# Altium PCB Plate.PcbDoc
Units mm, origin at the board's own origin, x right, y up, seen from the top; angles counter-clockwise.
Board outline 120.65 x 77.47 mm, 2 copper layers (Top Layer, Bottom Layer), stack 1.071 mm thick; 56 components, 72 nets, 283 pads, 18 vias.
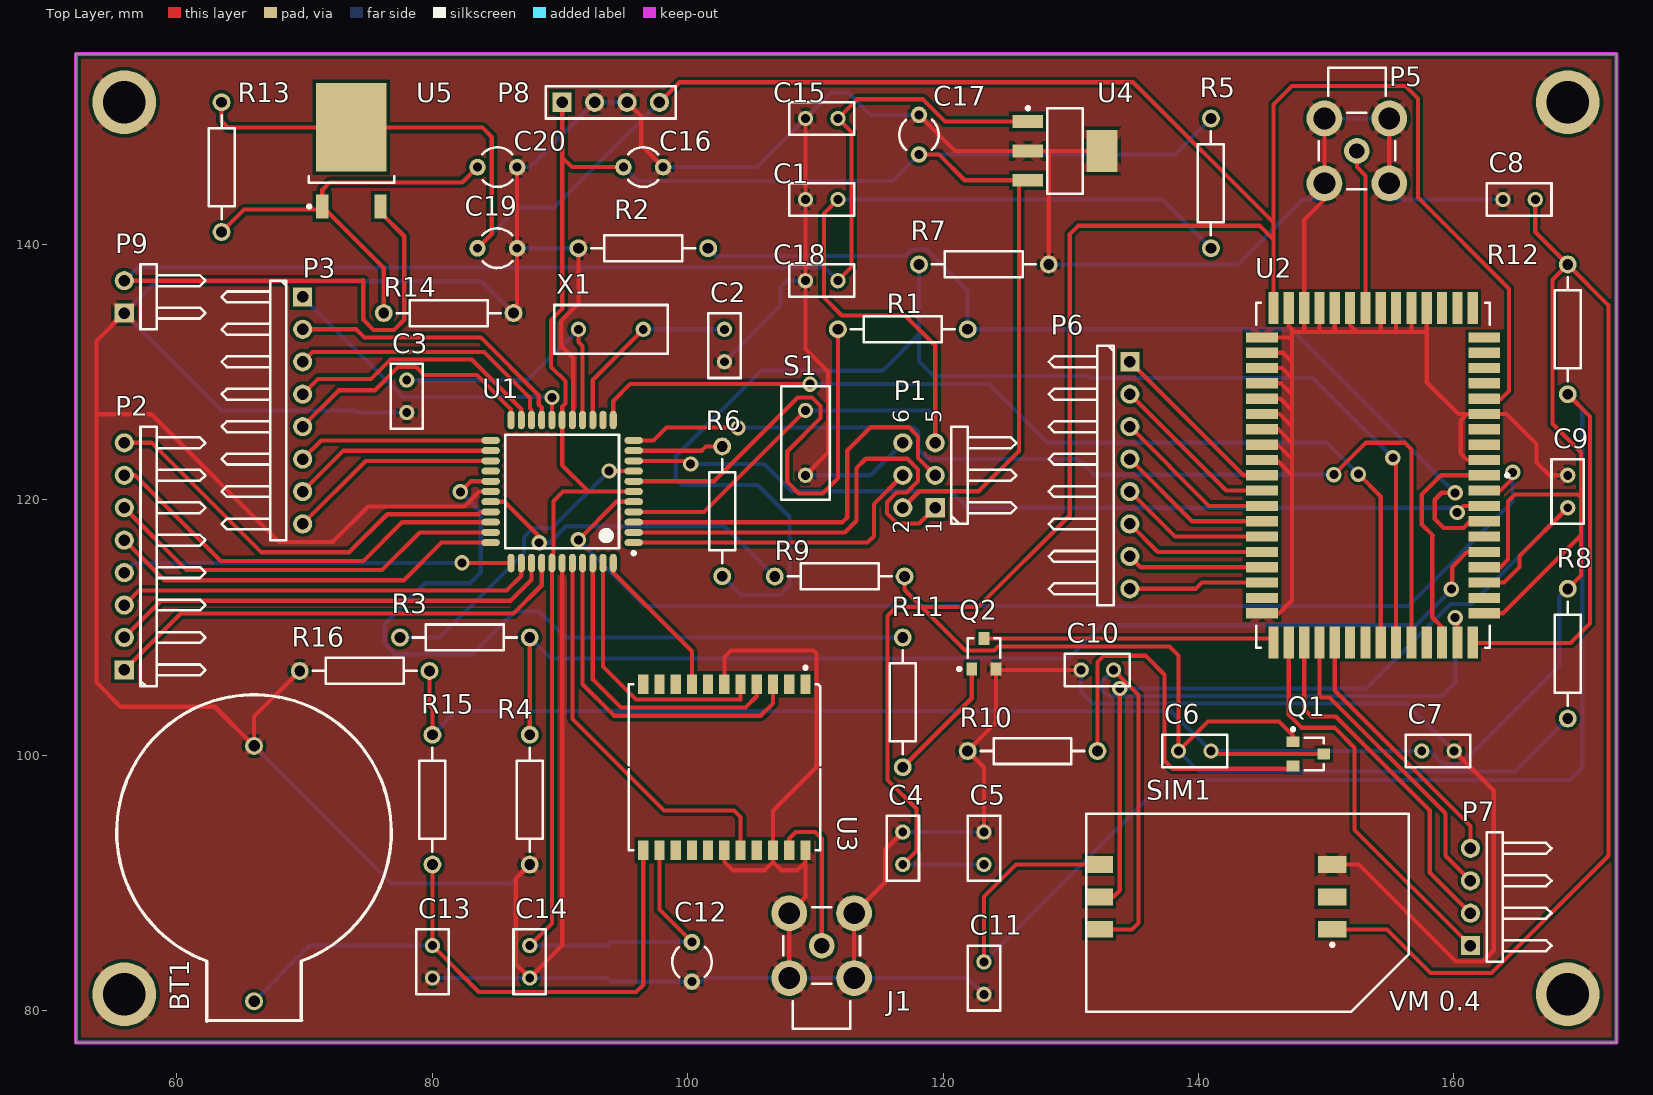
[diagram p0: Top Layer view]
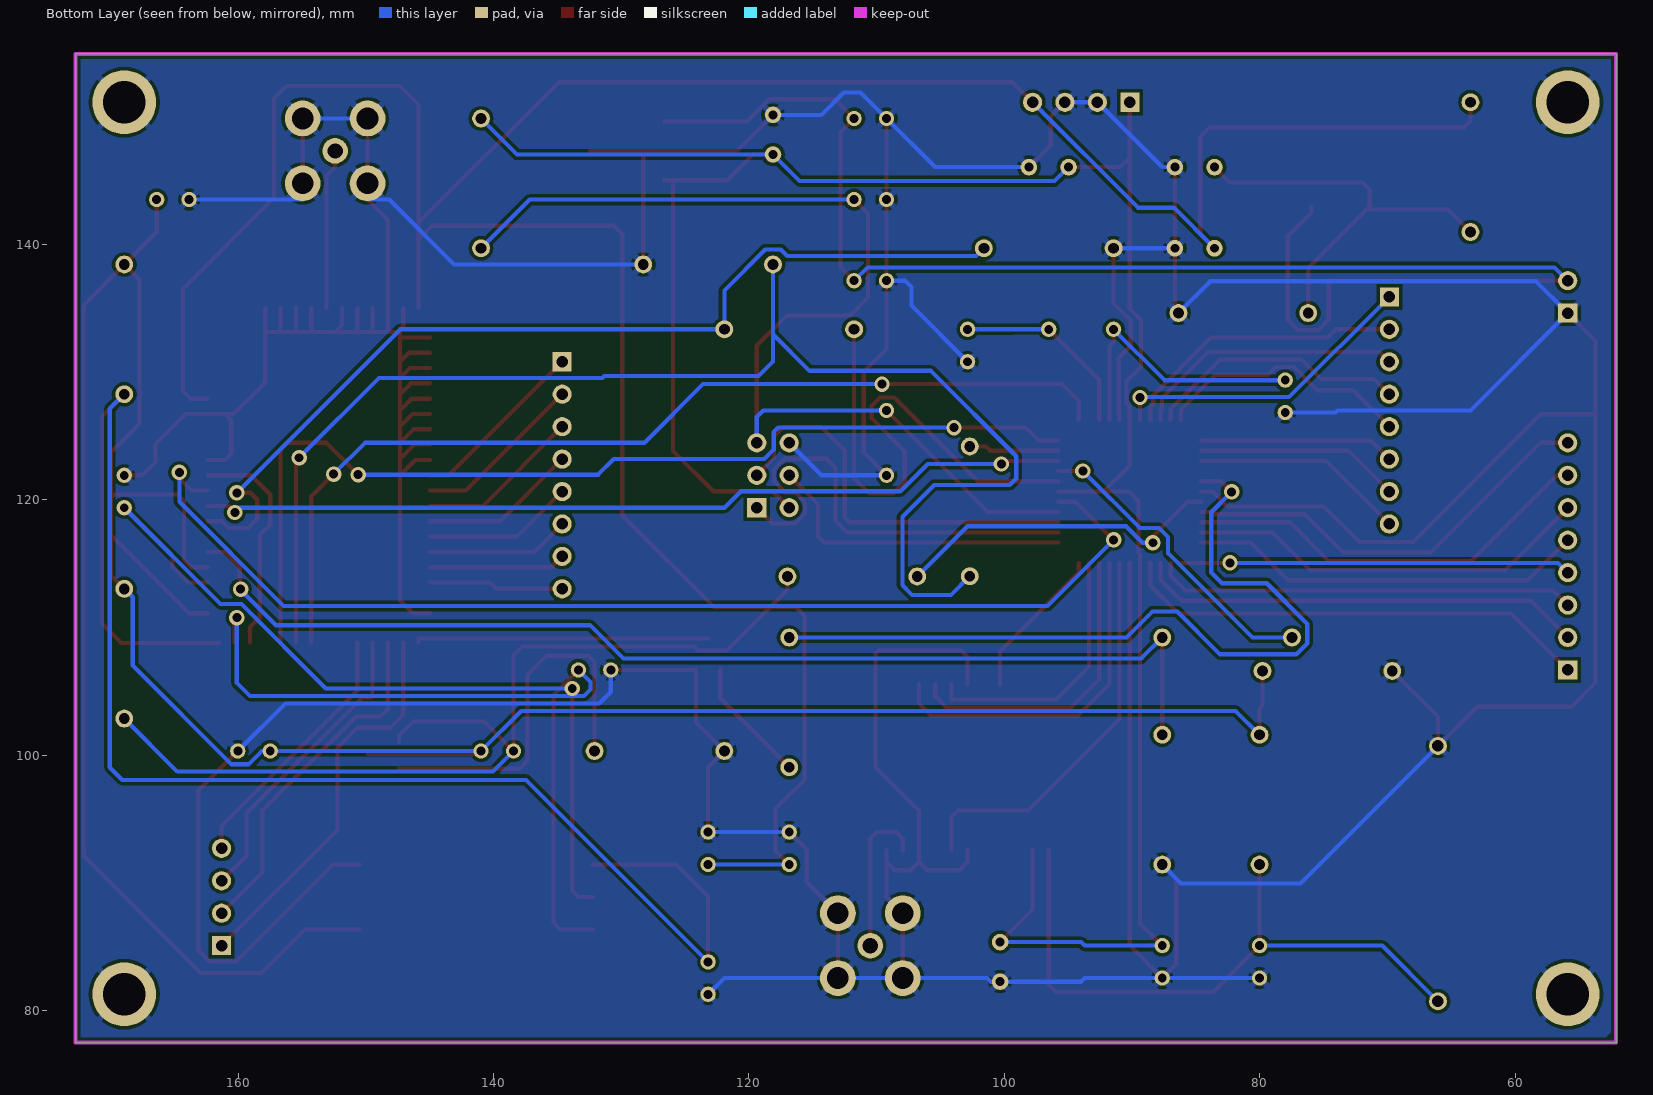
[diagram p1: Bottom Layer view, seen from below]

## Layer stack, top to bottom
Top Layer: signal copper 0.0356
Dielectric: core 1, FR-4, Dk 4.8
Bottom Layer: signal copper 0.0356

## Board outline
52.07,154.94 170.18,154.94 171.45,154.94 172.72,154.94 172.72,77.47 52.07,77.47

## Design rules (kind name [scope] priority, off if disabled: settings)
Clearance Clearance_3 [InNetClass('U1_Nets')] p1: gap=0.254
Clearance [InNetClass('U2_Nets') Or InNetClass('U3_Nets')  Or  InNetClass('U4_Nets') Or  InNetClass('U5_Nets')  Or  InNetClass('Q1_Nets') Or  InNetClass('Q2_Nets') vs Not InNetClass('U1_Nets')] p2 off: gap=0.4
Clearance Clearance_1 [Not InNetClass('U1_Nets') And Not InNetClass('U2_Nets') And Not InNetClass('U3_Nets') And Not InNetClass('U4_Nets') And Not  InNetClass('U5_Nets') And Not InNetClass('Q1_Nets') And Not  InNetClass('Q2_Nets') vs InNet('GND')] p3: gap=0.5
Clearance Clearance_2 [All] p4 off: gap=0.5
HoleSize [All] p1: absolutevalues=TRUE maxlimit=2.54 minlimit=0.3 maxpercent=80.000 minpercent=20.000
HoleToHoleClearance [All] p1: gap=2.54 allowstackedmicrovias=TRUE
PlaneClearance [All] p1: clearance=1.27
PlaneConnect [All] p1: planeconnectstyle=Relief reliefexpansion=0.5 reliefentries=4 reliefconductorwidth=1 reliefairgap=0.35
PolygonConnect [All] p1: connectstyle=Relief reliefconductorwidth=0.5 reliefentries=4 polygonreliefangle="45 Angle"
RoutingTopology [All] p1 off: topology=Daisy_MidDriven
RoutingVias [All] p1: holewidth=0.7 width=1.2 viastyle="Through Hole" minholewidth=0.7 minwidth=1.2 maxholewidth=0.7 maxwidth=1.2
SMDNeckDown [All] p1: percent=85.000
SilkscreenOverComponentPads [All] p1: minsilkscreentomaskgap=0.254
SolderMaskExpansion [All] p1: expansion=0.2
Width Width_2 [All] p1: maxlimit=0.4 minlimit=0.254 preferedwidth=0.33
Width [InNetClass('U1_Nets')] p2 off: maxlimit=0.45 minlimit=0.45 preferedwidth=0.45 checkconnectedcopper=TRUE
Width Width_1 [Not InNetClass('U1_Nets')] p3 off: maxlimit=1 minlimit=0.5 preferedwidth=0.6 checkconnectedcopper=TRUE
22 further rules are at their usual default settings.

## Classes and differential pairs
net class X1_Nets: NetC2_2 NetC3_2
net class U5_Nets: "+5 - 15V" NetC4_1 NetC20_1
net class U4_Nets: "+5 - 15V" GND NetC12_1
net class U3_Nets: GND NetBT1_1 NetC12_1 NetJ1_1 NetU1_40 NetU1_41 NetU1_42 NetU1_43 NetU1_44 NetU3_1 NetU3_2 NetU3_7 NetU3_9 NetU3_10 NetU3_11 NetU3_14 NetU3_15 NetU3_16 NetU3_19
net class U2_Nets: _CTS_ATM _DCD_ATM _DSR_ATM _RX_ATM GND NetC4_1 NetC6_2 NetC8_2 NetC9_2 NetC10_2 NetC11_2 NetP5_1 NetP6_1 NetP6_2 NetP6_3 NetP6_4 NetP6_5 NetP6_6 NetP6_7 NetP6_8 NetP7_1 NetP7_2 NetP7_3 NetP7_4 NetQ2_3 NetR1_1 NetR3_1 NetR6_1 NetU2_1 NetU2_2 NetU2_3 NetU2_4 NetU2_7 NetU2_8 NetU2_10 NetU2_14 NetU2_18 NetU2_23 NetU2_27 NetU2_28 NetU2_35 NetU2_64 NetU2_65 NetU2_66
net class U1_Nets: /RST _CTS_ATM _DCD_ATM _DSR_ATM _DTR_ATM _RING0_ATM _RTS_ATM _RX_ATM _TX_ATM GND MISO MOSI NetC2_2 NetC3_2 NetC12_1 NetP2_1 NetP2_2 NetP2_3 NetP2_4 NetP2_5 NetP2_6 NetP2_7 NetP2_8 NetP3_1 NetP3_2 NetP3_3 NetP3_4 NetP3_5 NetP3_6 NetP3_7 NetP3_8 NetR9_1 NetR11_1 NetU1_26 NetU1_40 NetU1_41 NetU1_42 NetU1_43 NetU1_44 SCK
net class SIM1_Nets: GND NetC8_2 NetC9_2 NetC10_2 NetC11_2 NetSIM1_5
net class R16_Nets: GND NetC6_2
net class R15_Nets: NetBT1_1 NetC6_2
net class R14_Nets: GND NetC20_1
net class R13_Nets: NetC4_1 NetC20_1
net class R12_Nets: NetC8_2 NetC11_2
net class R11_Nets: NetQ2_1 NetR11_1
net class R10_Nets: GND NetQ1_2
net class R9_Nets: NetC6_1 NetR9_1
net class R8_Nets: NetC6_1 NetC6_2
net class R7_Nets: GND NetR6_1
net class R6_Nets: _DTR_ATM NetR6_1
net class R5_Nets: /RST NetC12_1
net class R4_Nets: GND NetR3_1
net class R3_Nets: _RTS_ATM NetR3_1
net class R2_Nets: GND NetR1_1
net class R1_Nets: _TX_ATM NetR1_1
net class Q2_Nets: GND NetQ2_1 NetQ2_3
net class Q1_Nets: NetC6_1 NetC6_2 NetQ1_2
net class P9_Nets: "+5 - 15V" GND
net class P8_Nets: GND NetC4_1 NetC12_1
net class P7_Nets: NetP7_1 NetP7_2 NetP7_3 NetP7_4
net class P6_Nets: NetP6_1 NetP6_2 NetP6_3 NetP6_4 NetP6_5 NetP6_6 NetP6_7 NetP6_8
net class P5_Nets: GND NetP5_1
net class P3_Nets: NetP3_1 NetP3_2 NetP3_3 NetP3_4 NetP3_5 NetP3_6 NetP3_7 NetP3_8
net class P2_Nets: NetP2_1 NetP2_2 NetP2_3 NetP2_4 NetP2_5 NetP2_6 NetP2_7 NetP2_8
net class P1_Nets: /RST GND MISO MOSI NetC12_1 SCK
net class J1_Nets: GND NetJ1_1
net class C20_Nets: GND NetC20_1
net class C19_Nets: GND NetC4_1
net class C18_Nets: "+5 - 15V" GND
net class C17_Nets: GND NetC12_1
net class C16_Nets: GND NetC12_1
net class C15_Nets: "+5 - 15V" GND
net class C14_Nets: GND NetC12_1
net class C13_Nets: GND NetBT1_1
net class C12_Nets: GND NetC12_1
net class C11_Nets: GND NetC11_2
net class C10_Nets: GND NetC10_2
net class C9_Nets: GND NetC9_2
net class C8_Nets: GND NetC8_2
net class C7_Nets: GND NetC6_2
net class C6_Nets: NetC6_1 NetC6_2
net class C5_Nets: GND NetC4_1
net class C4_Nets: GND NetC4_1
net class C3_Nets: GND NetC3_2
net class C2_Nets: GND NetC2_2
net class C1_Nets: /RST GND
net class BT1_Nets: GND NetBT1_1
component class LDO: C15 C16 C17 C18 C19 C20 P8 P9 R13 R14 R15 R16 U4 U5
component class "GSM - BGS2": C4 C5 C6 C7 C8 C9 C10 C11 P5 P6 P7 Q1 Q2 R8 R9 R10 R11 R12 SIM1 U2
component class "GPS - ML8088s": C12 C13 C14 J1 U3
component class ATMEGA162: C1 C2 C3 P1 P2 P3 R1 R2 R3 R4 R5 R6 R7 U1 X1

## Components (designator, comment, footprint, x,y, rotation, side; value= is the part's Value field where it differs from the comment)
BT1 "Battery" "Edge Connector" 66.04,93.98 r0 top
C1 "Cap" RAD-0.1 110.49,143.51 r0 top
C2 "Cap" RAD-0.1 102.87,132.08 r90 top
C3 "Cap" RAD-0.1 78,128.1 r90 top
C4 "Cap" RAD-0.1 116.84,92.71 r90 top
C5 "Cap" RAD-0.1 123.19,92.71 r90 top
C6 "Cap" RAD-0.1 139.7,100.33 r0 top
C7 "Cap" RAD-0.1 158.75,100.33 r0 top
C8 "Cap" RAD-0.1 165.1,143.51 r0 top
C9 "Cap" RAD-0.1 168.91,120.65 r270 top
C10 "Cap" RAD-0.1 132.08,106.68 r0 top
C11 "Cap" RAD-0.1 123.19,82.55 r90 top
C12 "Cap Pol1" R38 100.33,83.82 r0 top
C13 "Cap" RAD-0.1 80.01,83.82 r90 top
C14 "Cap" RAD-0.1 87.63,83.82 r90 top
C15 "Cap" RAD-0.1 110.49,149.86 r0 top
C16 "Cap" R38 96.52,146.05 r270 top
C17 "Cap" R38 118.11,148.59 r0 top
C18 "Cap" RAD-0.1 110.49,137.16 r0 top
C19 "Cap Pol1" R38 85.09,139.7 r90 top
C20 "Cap Pol1" R38 85.09,146.05 r90 top
J1 "COAX-F" MCX5.08-H5 110.49,85.09 r90 top
P1 "Header 3X2H" HDR2X3H 119.38,119.38 r90 top
P2 "PORT A" HDR1X8H 55.88,106.68 r90 top
P3 "PORT C" HDR1X8H 69.85,135.89 r270 top
P5 "COAX-M" MCX5.08-H5 152.4,147.32 r270 top
P6 "GPIO_GSM" HDR1X8H 134.62,130.81 r270 top
P7 "ASC1" HDR1X4H 161.29,85.09 r90 top
P8 "4G3" HDR1X4 90.17,151.13 r0 top
P9 "PWR" HDR1X2H 55.88,134.62 r90 top
Q1 "BC817-25" SOT-23A 148.6,100.1 r270 top
Q2 "BC817-25" SOT-23A 123.19,107.95 r0 top
R1 "Res2" AXIAL-0.4 116.84,133.35 r180 top
R2 "Res2" AXIAL-0.4 96.52,139.7 r0 top
R3 "Res2" AXIAL-0.4 82.55,109.22 r180 top
R4 "Res2" AXIAL-0.4 87.63,96.52 r90 top
R5 "Res2" AXIAL-0.4 140.97,144.78 r270 top
R6 "Res2" AXIAL-0.4 102.7,119.1 r90 top
R7 "Res2" AXIAL-0.4 123.19,138.43 r180 top
R8 "Res2" AXIAL-0.4 168.91,107.95 r90 top
R9 "Res2" AXIAL-0.4 111.9,114 r0 top
R10 "Res2" AXIAL-0.4 127,100.33 r180 top
R11 "Res2" AXIAL-0.4 116.84,104.14 r270 top
R12 "Res2" AXIAL-0.4 168.91,133.35 r90 top
R13 "Res2" AXIAL-0.4 63.5,146.05 r90 top
R14 "Res2" AXIAL-0.4 81.28,134.62 r180 top
R15 "Res2" AXIAL-0.4 80.01,96.52 r270 top
R16 "Res2" AXIAL-0.4 74.7,106.6 r0 top
S1 "Comment" RAD-0.2 109.22,124.46 r90 top
SIM1 "simcon" SIMCON-6pin 77.47,106.68 r180 top
U1 "ATmega162-16AI" 44A_L 90.17,120.65 r180 top
U2 "BGS2-E8" QFN120P2700X1820X270-66M 153.67,121.92 r270 top
U3 "Component_1" LCCS127P1300X1500X280-22M 102.87,99.06 r270 top
U4 "LM2937IMP-3.3" MP04A_N 129.54,147.32 r0 top
U5 "LM317MDT" TD03B_N 73.66,147.32 r90 top
X1 "XTAL" RAD-0.2 93.98,133.35 r0 top

## Footprints (in the part's own frame and the unit in brackets; to place one, negate y for a bottom-side part, rotate by r counter-clockwise, add the part's x,y. Pads: shape width x height; smd on the part's side, far side on the other; paste and mask are expansions set on the pad)
44A_L [mm] "Thin QFP, 44-Leads, Body 10x10mm, Pitch 0.8mm, IPC High Density"
  oval 1.45x0.55 smd: 1(-5.6,4) 2(-5.6,3.2) 3(-5.6,2.4) 4(-5.6,1.6) 5(-5.6,0.8) 6(-5.6,0) 7(-5.6,-0.8) 8(-5.6,-1.6) 9(-5.6,-2.4) 10(-5.6,-3.2) 11(-5.6,-4) 23(5.6,-4) 24(5.6,-3.2) 25(5.6,-2.4) 26(5.6,-1.6) 27(5.6,-0.8) 28(5.6,0) 29(5.6,0.8) 30(5.6,1.6) 31(5.6,2.4) 32(5.6,3.2) 33(5.6,4)
  oval 0.55x1.45 smd: 12(-4,-5.6) 13(-3.2,-5.6) 14(-2.4,-5.6) 15(-1.6,-5.6) 16(-0.8,-5.6) 17(0,-5.6) 18(0.8,-5.6) 19(1.6,-5.6) 20(2.4,-5.6) 21(3.2,-5.6) 22(4,-5.6) 34(4,5.6) 35(3.2,5.6) 36(2.4,5.6) 37(1.6,5.6) 38(0.8,5.6) 39(0,5.6) 40(-0.8,5.6) 41(-1.6,5.6) 42(-2.4,5.6) 43(-3.2,5.6) 44(-4,5.6)
  silkscreen extent -5.72,-4.45 4.45,4.95, body extent -5,-5 5,5, height 1.2
AXIAL-0.4 [mm] "Axial Device, Thru-Hole; 2 Leads; 0.4 in Pin Spacing"
  round 1.4 hole 0.85: 1(-5.08,0) 2(5.08,0)
  silkscreen extent -4.06,-1.02 4.06,1.02
"Edge Connector" [mm]
  round 1.4 hole 0.9: 1(0,-13.25) 2(0,6.75)
  silkscreen extent -10.75,-14.81 10.75,10.75
HDR1X2H [mm] "Connector; Header; 2 Position; Right Angle"
  rect 1.5x1.5 hole 0.9: 1(0,0)
  round 1.5 hole 0.9: 2(2.54,0)
  silkscreen extent -1.27,-6.35 3.81,-1.27
HDR1X4 [mm] "Connector; Header; 4 Position"
  rect 1.5x1.5 hole 0.9: 1(0,0)
  round 1.5 hole 0.9: 2(2.54,0) 3(5.08,0) 4(7.62,0)
  silkscreen extent -1.27,-1.27 8.89,1.27
HDR1X4H [mm] "Connector; Header; 4 Position; Right Angle"
  rect 1.5x1.5 hole 0.9: 1(0,0)
  round 1.5 hole 0.9: 2(2.54,0) 3(5.08,0) 4(7.62,0)
  silkscreen extent -1.27,-6.35 8.89,-1.27
HDR1X8H [mm] "Connector; Header; 8 Position; Right Angle"
  rect 1.5x1.5 hole 0.9: 1(0,0)
  round 1.5 hole 0.9: 2(2.54,0) 3(5.08,0) 4(7.62,0) 5(10.16,0) 6(12.7,0) 7(15.24,0) 8(17.78,0)
  silkscreen extent -1.27,-6.35 19.05,-1.27
HDR2X3H [mm] "Connector; Header; 3x2 Position; Right Angle"
  rect 1.5x1.5 hole 0.9: 1(0,0)
  round 1.5 hole 0.9: 2(0,2.54) 3(2.54,0) 4(2.54,2.54) 5(5.08,0) 6(5.08,2.54)
  silkscreen extent -1.27,-6.35 6.35,-1.27
LCCS127P1300X1500X280-22M [mm] "LCC, 22-Pins, Body 13,0x15,0mm (max), Pitch 1,27mm, IPC Low Density"
  rect 1.5x0.8 smd: 1(-6.5,6.35) 2(-6.5,5.08) 3(-6.5,3.81) 4(-6.5,2.54) 5(-6.5,1.27) 6(-6.5,0) 7(-6.5,-1.27) 8(-6.5,-2.54) 9(-6.5,-3.81) 10(-6.5,-5.08) 11(-6.5,-6.35) 12(6.5,-6.35) 13(6.5,-5.08) 14(6.5,-3.81) 15(6.5,-2.54) 16(6.5,-1.27) 17(6.5,0) 18(6.5,1.27) 19(6.5,2.54) 20(6.5,3.81) 21(6.5,5.08) 22(6.5,6.35)
  silkscreen extent -7.92,-7.5 6.5,7.5, body extent -6.5,-7.5 6.5,7.5, height 2.8
MCX5.08-H5 [mm] "Connector; RF Coaxial, MCX, Thru-Hole; 5 Position; Right-Angle"
  round 2 hole 1.2: 1(0,0)
  round 2.8 hole 1.7: 2(-2.54,-2.54) 3(2.54,-2.54) 4(2.54,2.54) 5(-2.54,2.54)
  silkscreen extent -6.5,-3 3,3
MP04A_N [mm] "SOT223, 4-Leads, Body 6.5x3.5mm, Pitch 2.3mm, Lead Span 7mm, IPC Medium Density"
  rect 2.4x1 smd: 1(-2.9,2.3) 2(-2.9,0) 3(-2.9,-2.3)
  rect 2.4x3.3 smd: 4(2.9,0)
  silkscreen extent -3.02,-3.35 1.4,3.47, body extent -1.85,-3.35 1.85,3.35, height 1.8
QFN120P2700X1820X270-66M [mm] "QFN, 66-Leads, Body 18,2x27,0mm (max), Pitch 1,20mm, IPC Low Density"
  rect 0.8x2.5 smd: 1(-10.8,8.7) 2(-9.6,8.7) 3(-8.4,8.7) 4(-7.2,8.7) 5(-6,8.7) 6(-4.8,8.7) 7(-3.6,8.7) 8(-2.4,8.7) 9(-1.2,8.7) 10(0,8.7) 11(1.2,8.7) 12(2.4,8.7) 13(3.6,8.7) 14(4.8,8.7) 15(6,8.7) 16(7.2,8.7) 17(8.4,8.7) 18(9.6,8.7) 19(10.8,8.7) 34(10.8,-8.7) 35(9.6,-8.7) 36(8.4,-8.7) 37(7.2,-8.7) 38(6,-8.7) 39(4.8,-8.7) 40(3.6,-8.7) 41(2.4,-8.7) 42(1.2,-8.7) 43(0,-8.7) 44(-1.2,-8.7) 45(-2.4,-8.7) 46(-3.6,-8.7) 47(-4.8,-8.7) 48(-6,-8.7) 49(-7.2,-8.7) 50(-8.4,-8.7) 51(-9.6,-8.7) 52(-10.8,-8.7)
  rect 2.5x0.8 smd: 20(13.1,7.8) 21(13.1,6.6) 22(13.1,5.4) 23(13.1,4.2) 24(13.1,3) 25(13.1,1.8) 26(13.1,0.6) 27(13.1,-0.6) 28(13.1,-1.8) 29(13.1,-3) 30(13.1,-4.2) 31(13.1,-5.4) 32(13.1,-6.6) 33(13.1,-7.8) 53(-13.1,-7.8) 54(-13.1,-6.6) 55(-13.1,-5.4) 56(-13.1,-4.2) 57(-13.1,-3) 58(-13.1,-1.8) 59(-13.1,-0.6) 60(-13.1,0.6) 61(-13.1,1.8) 62(-13.1,3) 63(-13.1,4.2) 64(-13.1,5.4) 65(-13.1,6.6) 66(-13.1,7.8)
  silkscreen extent -13.5,-9.15 13.5,10.63, body extent -13.5,-9.1 13.5,9.1, height 2.7
R38 [mm] "Crystal, Thru-Hole; 2 Leads; Body 3.1 x 8.2 mm (Dia.xH)"
  round 1.3 hole 0.7: 1(0,1.55) 2(0,-1.55)
  silkscreen extent -1.55,-1.19 1.55,1.17
RAD-0.1 [mm] "Radial Cap, Thru-Hole; 2 Leads; 0.1 in Pin Spacing"
  round 1.2 hole 0.7: 1(-1.27,0) 2(1.27,0)
  silkscreen extent -2.54,-1.27 2.54,1.27
RAD-0.2 [mm] "Radial Cap, Thru-Hole; 2 Leads; 0.2 in Pin Spacing"
  round 1.2 hole 0.7: 1(-2.54,0) 2(2.54,0)
  silkscreen extent -4.44,-1.91 4.44,1.91
SIMCON-6pin [mm] "SOP, 6-Leads, Body 8,0x16,5mm (max), Pitch 2,54mm, IPC Low Density"
  rect 2.2x1.3 smd: 1(-54.75,15.24) 2(-54.75,17.78) 3(-54.75,20.32) 4(-73,15.24) 5(-73,17.78) 6(-73,20.32)
  silkscreen extent -79,11.25 -53.75,26.75, body extent -80,10.25 -53.5,27.75, height 2
SOT-23A [mm] "SOT-23; 3 Leads; Body 3.1 x 2.5 mm, inc. leads (LxW max)"
  rect 0.85x1 smd: 1(-0.95,-1.2) 2(0.95,-1.2) 3(0,1.2)
  silkscreen extent -2.05,-1.32 1.27,1.2
TD03B_N [mm] "D-PAK, 4-Leads, Body 6.1x6.6mm, Pitch 2.29mm, Lead Span 9.7mm, IPC Medium Density"
  rect 1.9x0.95 smd: 1(-4.35,2.28) 3(-4.35,-2.28)
  rect 6.9x5.5 smd: 4(1.85,0)
  silkscreen extent -4.47,-3.35 -2,3.43, body extent -2.5,-3.35 3.7,3.35, height 2.38

## Part data
BT1: "Multicell Battery"
C1 C2 C3 C4 C5 C6 C7 C8 C9 C10 C11 C13 C14 C15 C16 C17 C18: "Capacitor"
C12 C19 C20: "Polarized Capacitor (Radial)"
J1: "RF Coaxial PCB Connector, MCX; Thru-Hole, Right-Angle Mount Socket, Blunt Post Terminal, 50 Ohm Impedance"
P1: "Header, 3-Pin, Dual row, Right Angle"
P2 P3 P6: library part "Header 8H", "Header, 8-Pin, Right Angle"
P5: "RF Coaxial PCB Connector, MMCX; Thru-Hole, Vertical Mount Plug,  50 Ohm Impedance"
P7 P8: library part "Header 4H", "Header, 4-Pin, Right Angle"
P9: library part "Header 2H", "Header, 2-Pin, Right Angle"
Q1 Q2: "NPN General Purpose Amplifier"
R1 R2 R3 R4 R5 R6 R7 R8 R9 R10 R11 R12 R13 R14 R15 R16: "Resistor"
U1: "8-Bit AVR Microcontroller with 16K Bytes of In-System Programmable Flash Memory"
U4: "500 mA Low Dropout Regulator"
U5: "3-Terminal Adjustable Regulator"
X1: "Crystal Oscillator"

## Free pads (board coordinates)
  round 5 hole 3.3: 4(55.88,151.13) 5(168.91,151.13) 6(168.91,81.28) 7(55.88,81.28)

## Via types
v1: diameter 1.2, hole 0.7, Top Layer to Bottom Layer, 18 vias

## Nets (pads, with @x,y where several pads share a name; then routed paths per layer and width w, separated by ;. In a path a pad name is that pad's centre, name@x,y a point inside that pad or via, vN(x,y) a via of type N, cw(c..) or ccw(c..) an arc to the next point about the centre after c; other vN are vias at no path point)
"+5 - 15V": C15.2 C18.2 P9.2 U4.1 U5.3 | length 121.8
  Top Layer w0.33: P9.2 74.56,137.16 ; 74.6,137.2 74.6,134.1 75.4,133.3 77,133.3 77.8,134.1 77.8,140.634 75.94,142.494 U5.3 ; C18.2 112.827,138.227 112.827,148.793 C15.2 113.259,151.359 118.415,151.359 120.153,149.62 U4.1
  Bottom Layer w0.33: P9.2 56.921,138.201 110.719,138.201 C18.2
/RST: C1.2 P1.5 R5.2 S1.2 U1.4 | length 85.9
  Top Layer w0.33: U1.4 101.27,119.05 S1.2 ; C1.2 110.668,142.418 110.668,135.839 112.065,134.442 117.018,134.442 119.38,132.08 P1.5
  Bottom Layer w0.33: S1.2 118.872,127 119.38,126.492 P1.5 ; C1.2 137.16,143.51 R5.2
_CTS_ATM: U1.9 U2.12 | length 68.5
  Top Layer w0.33: U1.9 99.987,123.05 v1(100.228,122.809) ; v1(160.249,119.012) 160.757,119.52 U2.12
  Bottom Layer w0.33: v1(100.228,122.809) 105.994,122.809 108.128,120.675 120.625,120.675 121.92,119.38 159.881,119.38 v1(160.249,119.012)
_DCD_ATM: U1.12 U2.26 | length 77.2
  Top Layer w0.33: U1.12 94.17,127.737 95.491,129.057 v1(109.576,129.057) ; v1(152.512,122.011) 154.27,120.253 U2.26
  Bottom Layer w0.33: v1(109.576,129.057) 123.596,129.057 128.194,124.46 150.063,124.46 v1(152.512,122.011)
_DSR_ATM: U1.11 U2.24 | length 80
  Top Layer w0.33: U1.11 97.333,124.65 98.337,125.654 v1(103.937,125.654) ; v1(150.597,121.971) 153.086,124.46 156.162,124.46 156.67,123.952 U2.24
  Bottom Layer w0.33: v1(103.937,125.654) 117.704,125.654 118.059,125.298 118.059,123.927 118.796,123.19 130.581,123.19 131.801,121.971 v1(150.597,121.971)
_DTR_ATM: R6.2 U1.10 | length 7.1
  Top Layer w0.33: U1.10 101.092,123.85 101.422,124.18 R6.2
_RING0_ATM: U1.13
_RTS_ATM: R3.2 U1.8 | length 24.4
  Top Layer w0.33: v1(93.853,122.25) U1.8
  Bottom Layer w0.33: R3.2 80.575,109.22 87.176,115.821 87.176,117.076 87.884,117.784 89.387,117.784 v1(93.853,122.25)
_RX_ATM: U1.5 U2.11 | length 89.6
  Top Layer w0.33: v1(91.44,116.865) 94.425,119.85 U1.5 ; U2.11 163.646,120.72 164.592,121.666 v1(164.592,122.149)
  Bottom Layer w0.33: v1(91.44,116.865) 96.622,111.684 156.429,111.684 164.592,119.847 v1(164.592,122.149)
_TX_ATM: R1.2 U1.7 | length 41.1
  Top Layer w0.33: U1.7 102.05,121.45 108.619,128.019 109.728,128.019 110.4,127.347 110.4,126.402 107.8,123.802 107.8,121.4 108.7,120.5 110.569,120.5 111.76,121.691 R1.2
GND: BT1.2 C1.1 C2.1 C3.1 C4.2 C5.2 C7.2 C8.1 C9.1 C10.1 C11.1 C12.2 C13.1 C14.1 C15.1 C16.1 C17.1 C18.1 C19.2 C20.2 J1.2 J1.3 J1.4 J1.5 P1.6 P5.2 P5.3 P5.4 P5.5 P8.2 P8.3 P9.1 pad.4 pad.5 pad.6 pad.7 Q2.2 R2.1 R4.1 R7.1 R10.2 R14.1 R16.1 S1.1 SIM1.4 U1.16 U1.28 U1.39 U2.6 U2.9 U2.34 U2.44 U2.45 U2.46 U2.47 U2.48 U2.49 U2.50 U2.51 U2.52 U2.54 U2.55 U2.56 U2.57 U2.58 U2.60 U2.61 U2.62 U2.63 U3.6 U3.17 U3.20 U3.22 U4.2 U4.4 | length 715.5
  Top Layer w0.33: 53.7,126.7 58,126.7 68,116.7 72.2,116.7 74.982,119.482 82.512,119.482 83.68,120.65 U1.28 ; P9.1 53.7,132.44 53.7,105.7 55.6,103.8 62.97,103.8 BT1.2 66.04,103.02 R16.1 ; R14.1 86.64,134.62 C19.2 C20.2 ; R4.1 86.538,90.348 86.538,83.642 C14.1 90.17,85.09 U1.39 ; U1.16 90.97,126.695 91.034,126.759 91.034,131.115 90.1,132.048 90.1,134.045 91.44,135.385 R2.1 ; P8.3 96.368,150.012 96.368,147.752 C16.1 ; U3.17 102.87,91.643 103.513,91 106.037,91 106.68,91.643 ; U3.6 102.87,107.696 103.378,108.204 109.855,108.204 110.084,107.975 110.084,99.06 106.68,95.656 U3.20 106.68,91.643 ; J1.5 J1.4 109.22,88.9 109.22,91.643 ; U3.22 109.22,91.643 ; S1.1 111,123.7 111,130.039 109.22,131.819 C18.1 C1.1 C15.1 ; J1.2 J1.3 115.468,90.068 115.468,92.608 C4.2 ; C17.1 120.93,147.32 U4.2 128.016,147.32 ; C5.2 123.19,99.06 R10.2 124.14,102.55 Q2.2@124.14,106.68 ; Q2.2 Q2.2@124.14,106.68 ; R7.1 128.27,147.066 128.016,147.32 ; C10.1 Q2.2@124.14,106.68 ; U4.4 128.016,147.32 ; U2.34 146.304,111.12 147.32,112.136 147.32,121.92 ; U2.44 146.12,123.12 147.32,121.92 ; U2.45 146.19,124.32 147.32,123.19 ; U2.46 146.26,125.52 147.32,124.46 ; U2.47 146.33,126.72 147.32,125.73 ; U2.48 146.4,127.92 147.32,127 ; U2.49 146.47,129.12 147.32,128.27 ; U2.50 146.54,130.32 147.32,129.54 ; U2.51 146.61,131.52 147.32,130.81 ; U2.52 147.32,132.72 ; U2.54 147.07,133.6 147.32,133.35 ; 148.27,133.35 U2.55 148.27,141.92 149.86,143.51 P5.2 ; U2.56 149.47,133.151 ; SIM1.4 152.552,91.44 160.147,83.845 162.255,83.845 163.119,84.709 163.119,97.231 C7.2 ; U2.57 150.67,133.151 ; U2.58 151.87,133.681 152.4,133.151 ; U2.60 154.27,133.151 ; P5.4@154.94,143.51 P5.5 ; U2.61 155.47,133.151 ; U2.62 156.67,133.151 ; U2.63 157.87,133.151 ; U2.9 161.036,123.12 160.528,123.628 160.528,126.212 161.036,126.72 ; C9.1 167.477,121.92 166.468,122.929 166.468,124.362 164.11,126.72 U2.6 161.036,126.72 ; 106.68,91.643 107.323,91 108.577,91 109.22,91.643 ; 147.32,121.92 147.32,123.19 ; 147.32,123.19 147.32,124.46 ; 147.32,124.46 147.32,125.73 ; 147.32,125.73 147.32,127 ; 147.32,127 147.32,128.27 ; 147.32,128.27 147.32,129.54 ; 147.32,129.54 147.32,130.81 ; 147.32,130.81 147.32,132.72 ; 147.32,132.72 147.32,133.35 ; 147.32,133.35 147.519,133.151 149.47,133.151 ; 149.47,133.151 150.67,133.151 ; 150.67,133.151 152.4,133.151 ; 152.4,133.151 154.27,133.151 ; 154.27,133.151 155.47,133.151 ; 155.47,133.151 156.67,133.151 ; 156.67,133.151 157.87,133.151 ; 157.87,133.151 157.87,129.2 160.35,126.72 161.036,126.72
  Bottom Layer w0.33: BT1.2 76.803,89.967 86.157,89.967 R4.1 ; C3.1 74.066,126.83 73.896,127 63.5,127 P9.1 58.369,137.109 83.871,137.109 R14.1 ; C13.1 C14.1 93.7,82.55 93.98,82.27 C12.2 101.066,82.27 101.346,82.55 J1.5 J1.2 121.92,82.55 C11.1 ; C19.2@86.524,139.7 C19.2 R2.1 ; C20.2 87.63,146.05 P8.2 P8.3 ; C16.1 105.41,146.05 C15.1 111.252,151.892 112.573,151.892 114.325,150.14 C17.1 ; C2.1 107.264,135.204 107.264,136.652 107.772,137.16 C18.1 ; S1.1 114.3,121.92 P1.6 ; C4.2 C5.2 ; R7.1 143.078,138.43 148.158,143.51 P5.3@149.86,143.51 ; C10.1 130.81,104.969 131.721,104.058 156.292,104.058 C7.2 ; P5.2 P5.5 ; P5.4@154.94,143.51 C8.1
MISO: P1.1 U1.2 | length 37
  Top Layer w0.33: U1.2 112.294,117.45 113.208,118.364 113.208,122.479 113.944,123.215 117.198,123.215 118.034,122.379 118.034,121.461 117.147,120.574 116.357,120.574 115.595,119.812 115.595,118.923 116.383,118.135 118.135,118.135 P1.1
MOSI: P1.4 U1.1 | length 24.7
  Top Layer w0.33: U1.1 114.085,116.65 114.579,117.145 114.579,119.659 P1.4
NetBT1_1: BT1.1 C13.2 R15.2 U3.12 | length 50.9
  Top Layer w0.33: R15.2 C13.2 83.642,81.458 95.961,81.458 96.52,82.017 U3.12
  Bottom Layer w0.33: BT1.1 70.4,85.09 C13.2
NetC2_2: C2.2 U1.14 X1.2 | length 15.1
  Top Layer w0.33: U1.14 92.57,129.4 X1.2
  Bottom Layer w0.33: X1.2 99.339,133.35 C2.2
NetC3_2: C3.2 U1.15 X1.1 | length 22.3
  Top Layer w0.33: X1.1 91.44,132.359 91.77,132.029 U1.15
  Bottom Layer w0.33: C3.2 87.46,129.37 X1.1
NetC4_1: C4.1 C5.1 C19.1 P8.4 R13.2 U2.5 U2.53 U5.4 | length 244.3
  Top Layer w0.33: R13.2 63.5,149.657 64.008,149.149 U5.4@73.66,149.149 ; U5.4 U5.4@73.66,149.149 ; C19.1 84.658,140.818 84.658,148.412 83.922,149.149 U5.4@73.66,149.149 ; P8.4 99.36,152.7 134.879,152.7 145.87,141.709 ; C4.1 117.907,92.507 117.907,95.809 115.646,98.069 115.646,110.922 116.332,111.608 122.733,111.608 129.921,118.796 129.921,140.818 130.556,141.453 144.801,141.453 145.87,140.384 ; U2.53 145.87,140.384 ; U2.5 163.709,127.92 164.313,128.524 164.313,136.525 157.175,143.662 157.175,151.435 156.21,152.4 147.32,152.4 145.87,150.95 145.87,141.709 ; 145.87,140.384 145.87,141.709
  Bottom Layer w0.33: C19.1 86.715,142.875 89.535,142.875 P8.4 ; C4.1 C5.1
NetC6_1: C6.1 Q1.1 R8.1 R9.2 | length 76.1
  Top Layer w0.33: R9.2 116.98,112.954 121.73,108.204 124.003,108.204 124.308,108.509 137.719,108.509 138.43,107.798 C6.1 140.741,102.641 146.294,102.641 147.4,101.535 147.4,101.2 Q1.1
  Bottom Layer w0.33: C6.1 140.033,98.727 164.767,98.727 R8.1
NetC6_2: C6.2 C7.1 Q1.3 R8.2 R15.1 R16.2 U2.16 | length 134.5
  Top Layer w0.33: R16.2 79.78,103.887 80.01,103.657 R15.1 ; C6.2 141.2,100.1 Q1.3 ; U2.16 163.64,114.72 164.236,115.316 164.236,119.888 164.77,120.421 169.697,120.421 169.951,120.167 169.951,114.071 R8.2
  Bottom Layer w0.33: R15.1 81.884,103.474 137.826,103.474 C6.2 C7.1 158.137,100.33 159.179,99.289 160.503,99.289 168.25,107.036 168.25,112.37 R8.2
NetC8_2: C8.2 R12.2 SIM1.6 U2.19 | length 113.3
  Top Layer w0.33: SIM1.6 154.762,86.36 158.166,82.956 162.941,82.956 172.11,92.126 172.11,135.23 R12.2 ; U2.19 163.85,111.12 169.951,117.221 169.951,123.723 167.716,125.959 167.716,137.236 R12.2 ; C8.2 166.37,140.97 R12.2
NetC9_2: C9.2 SIM1.2 U2.17 | length 68.1
  Top Layer w0.33: SIM1.2 133.325,88.9 133.833,89.408 v1(133.833,105.229) ; U2.17 163.912,113.52 165.132,114.74 165.132,115.602 C9.2
  Bottom Layer w0.33: v1(133.833,105.229) 153.133,105.229 159.74,111.836 161.366,111.836 C9.2
NetC10_2: C10.2 SIM1.3 U2.21 | length 61.3
  Top Layer w0.33: SIM1.3 134.798,86.36 135.306,86.868 135.306,104.724 C10.2 ; v1(160.096,110.769) 160.27,110.596 U2.21
  Bottom Layer w0.33: C10.2 132.41,105.74 132.41,105.156 132.924,104.642 159.074,104.642 160.096,105.664 v1(160.096,110.769)
NetC11_2: C11.2 R12.1 SIM1.1 U2.20 | length 126.6
  Top Layer w0.33: C11.2 123.19,88.925 125.705,91.44 SIM1.1 ; U2.20 161.47,108.814 161.495,108.788 169.139,108.788 170.662,110.312 170.662,126.518 R12.1
  Bottom Layer w0.33: C11.2 137.439,98.069 169.062,98.069 170.053,99.06 170.053,127.127 R12.1
NetC12_1: C12.1 C14.2 C16.2 C17.2 P1.2 P8.1 R5.1 U1.6 U1.17 U1.38 U3.13 U4.3 | length 190.6
  Top Layer w0.33: C14.2 89.37,86.83 U1.38 89.37,115.722 89.484,115.837 89.484,119.888 90.246,120.65 92.227,120.65 ; P8.1 90.17,146.812 ; C16.2 90.932,146.05 90.17,146.812 ; U1.6 92.227,120.65 ; U3.13 97.79,87.91 C12.1 ; P1.2 118.135,120.675 122.784,120.675 125.933,123.825 U4.3@125.933,145.02 ; C17.2 119.671,147.04 121.691,145.02 U4.3@125.933,145.02 ; U4.3 U4.3@125.933,145.02 ; 90.17,146.812 90.17,134.953 89.3,134.083 89.3,130.413 90.424,129.289 90.424,127.54 90.17,127.286 U1.17 90.17,122.707 92.227,120.65
  Bottom Layer w0.33: C14.2 93.7,85.09 93.98,85.37 C12.1 ; C16.2 96.062,144.958 116.028,144.958 C17.2 138.15,147.04 R5.1
NetC20_1: C20.1 R13.1 R14.2 U5.1 | length 33.4
  Top Layer w0.33: R13.1 65.253,142.723 71.38,142.723 U5.1 ; R14.2 76.2,138.15 U5.1 ; C20.1 82.346,144.856 71.964,144.856 71.38,144.272 U5.1
NetJ1_1: J1.1 U3.21 | length 12.3
  Top Layer w0.33: U3.21 107.95,93.472 108.458,93.98 109.982,93.98 110.49,93.472 J1.1
NetP2_1: P2.1 U1.37 | length 37.2
  Top Layer w0.33: P2.1 60.3,111.1 86.36,111.1 88.57,113.31 U1.37
NetP2_2: P2.2 U1.36 | length 35.1
  Top Layer w0.33: P2.2 58.76,112.1 86.128,112.1 87.77,113.742 U1.36
NetP2_3: P2.3 U1.35 | length 33
  Top Layer w0.33: P2.3 57.02,112.9 85.824,112.9 86.97,114.046 U1.35
NetP2_4: P2.4 U1.34 | length 30.6
  Top Layer w0.33: v1(82.321,115.062) 86.17,115.062 U1.34
  Bottom Layer w0.33: P2.4 56.642,115.062 v1(82.321,115.062)
NetP2_5: P2.5 U1.33 | length 31.2
  Top Layer w0.33: P2.5 59.02,113.7 77.771,113.7 80.721,116.65 U1.33
NetP2_6: P2.6 U1.32 | length 31.9
  Top Layer w0.33: P2.6 60.76,114.5 76.069,114.5 79.019,117.45 U1.32
NetP2_7: P2.7 U1.31 | length 32.7
  Top Layer w0.33: P2.7 56.718,121.92 63.438,115.2 74.6,115.2 77.65,118.25 U1.31
NetP2_8: P2.8 U1.30 | length 33.5
  Top Layer w0.33: P2.8 58.04,124.46 66.6,115.9 73.5,115.9 76.472,118.872 83.619,118.872 83.797,119.05 U1.30
NetP3_1: P3.1 U1.18 | length 24.5
  Top Layer w0.33: U1.18 v1(89.37,128.016)
  Bottom Layer w0.33: P3.1 77.699,128.041 89.345,128.041 v1(89.37,128.016)
NetP3_2: P3.2 U1.19 | length 22.7
  Top Layer w0.33: P3.2 74.05,133.35 74.684,132.716 83.806,132.716 88.34,128.182 88.34,127.459 88.57,127.228 U1.19
NetP3_3: P3.3 U1.20 | length 21.4
  Top Layer w0.33: P3.3 70.612,131.572 84.051,131.572 87.645,127.978 87.645,127.162 87.77,127.038 U1.20
NetP3_4: P3.4 U1.21 | length 20.7
  Top Layer w0.33: P3.4 71.044,129.464 75.199,129.464 76.723,130.988 83.094,130.988 86.97,127.112 U1.21
NetP3_5: P3.5 U1.22 | length 20.5
  Top Layer w0.33: P3.5 72.695,128.575 75.508,128.575 77.322,130.389 78.74,130.389 79.36,129.769 83.488,129.769 86.17,127.086 U1.22
NetP3_6: P3.6 U1.23 | length 15.3
  Top Layer w0.33: P3.6 71.31,124.65 U1.23
NetP3_7: P3.7 U1.24 | length 16
  Top Layer w0.33: P3.7 73.05,123.85 U1.24
NetP3_8: P3.8 U1.25 | length 16.8
  Top Layer w0.33: P3.8 74.79,123.05 U1.25
NetP5_1: P5.1 U2.59 | length 12.6
  Top Layer w0.33: P5.1 152.4,146.05 153.07,145.38 U2.59
NetP6_1: P6.1 U2.43 | length 14
  Top Layer w0.33: P6.1 143.51,121.92 U2.43
NetP6_2: P6.2 U2.42 | length 13.5
  Top Layer w0.33: P6.2 142.17,120.72 U2.42
NetP6_3: P6.3 U2.41 | length 12.9
  Top Layer w0.33: P6.3 140.83,119.52 U2.41
NetP6_4: P6.4 U2.40 | length 12.4
  Top Layer w0.33: P6.4 139.49,118.32 U2.40
NetP6_5: P6.5 U2.39 | length 11.8
  Top Layer w0.33: P6.5 138.15,117.12 U2.39
NetP6_6: P6.6 U2.38 | length 11.3
  Top Layer w0.33: P6.6 136.81,115.92 U2.38
NetP6_7: P6.7 U2.37 | length 10.7
  Top Layer w0.33: P6.7 135.47,114.72 U2.37
NetP6_8: P6.8 U2.36 | length 10.6
  Top Layer w0.33: P6.8 139.776,113.03 140.266,113.52 U2.36
NetP7_1: P7.1 U2.32 | length 31.1
  Top Layer w0.33: U2.32 147.07,103.149 148.061,102.159 150.647,102.159 152.222,100.584 152.222,94.158 P7.1
NetP7_2: P7.2 U2.31 | length 27.7
  Top Layer w0.33: U2.31 148.27,103.596 148.844,103.022 150.749,103.022 158.1,95.671 158.1,90.82 P7.2
NetP7_3: P7.3 U2.30 | length 23.9
  Top Layer w0.33: U2.30 149.47,104.648 149.597,104.521 150.266,104.521 159.334,95.453 159.334,92.126 P7.3
NetP7_4: P7.4 U2.29 | length 20.5
  Top Layer w0.33: U2.29 150.67,105.083 161.29,94.463 P7.4
NetQ1_2: Q1.2 R10.1 | length 30.1
  Top Layer w0.33: R10.1 132.08,107.29 132.588,107.798 135.839,107.798 137.338,106.299 137.338,99.568 137.973,98.933 Q1.2@147.4,98.933
NetQ2_1: Q2.1 R11.2 | length 9.9
  Top Layer w0.33: R11.2 122.24,104.46 Q2.1
NetQ2_3: Q2.3 U2.33 | length 23
  Top Layer w0.33: Q2.3 145.87,109.15 U2.33
NetR1_1: R1.1 R2.2 U2.13 | length 76.3
  Top Layer w0.33: v1(160.096,120.548) 159.048,120.548 158.5,120 158.5,118.5 159.2,117.8 160.745,117.8 161.265,118.32 U2.13
  Bottom Layer w0.33: R2.2 102.21,139.09 116.992,139.09 117.5,139.598 118.72,139.598 121.92,136.398 R1.1 147.295,133.35 v1(160.096,120.548)
NetR3_1: R3.1 R4.2 U2.15 | length 87.5
  Top Layer w0.33: R4.2 R3.1 ; v1(159.8,113) 159.863,113 159.863,114.747 161.036,115.92 U2.15
  Bottom Layer w0.33: R3.1 89.281,107.569 129.819,107.569 132.436,110.185 157.048,110.185 v1@159.832,112.969
NetR6_1: R6.1 R7.2 U2.25 | length 108.9
  Top Layer w0.33: v1(155.219,123.292) 155.47,123.041 U2.25
  Bottom Layer w0.33: R6.1 104.173,112.547 107.213,112.547 107.975,113.309 107.975,118.669 105.486,121.158 99.568,121.158 99.06,121.666 99.06,123.409 105.749,130.099 115.24,130.099 118.11,132.969 ; R7.2 118.11,132.969 ; v1(155.219,123.292) 148.971,129.54 131.47,129.54 131.318,129.692 119.253,129.692 118.11,130.835 118.11,132.969
NetR9_1: R9.1 U1.29 | length 26
  Top Layer w0.33: U1.29 85.661,119.85 88.367,117.145 v1(88.367,116.637)
  Bottom Layer w0.33: v1(88.367,116.637) 89.173,116.637 90.469,117.932 102.888,117.932 R9.1
NetR11_1: R11.1 U1.27 | length 63.6
  Top Layer w0.33: v1(82.194,120.625) 83.02,121.45 U1.27
  Bottom Layer w0.33: v1(82.194,120.625) 83.795,119.024 83.795,114.3 82.956,113.462 79.451,113.462 76.276,110.287 76.276,108.763 77.14,107.899 83.109,107.899 86.462,111.252 88.392,111.252 90.424,109.22 R11.1
NetU1_40: U1.40 U3.18 | length 31.2
  Top Layer w0.33: U1.40 90.97,113.805 90.983,113.792 90.983,102.845 98.146,95.682 103.632,95.682 104.14,95.174 U3.18
NetU1_41: U1.41 U3.3 | length 27.3
  Top Layer w0.33: U1.41 91.77,105.553 94.225,103.099 105.715,103.099 106.68,104.064 U3.3
NetU1_42: U1.42 U3.4 | length 24.2
  Top Layer w0.33: U1.42 92.57,105.931 94.768,103.734 104.521,103.734 105.41,104.623 U3.4
NetU1_43: U1.43 U3.5 | length 21.1
  Top Layer w0.33: U1.43 93.37,106.96 95.961,104.369 104.14,104.369 U3.5
NetU1_44: U1.44 U3.8 | length 12
  Top Layer w0.33: U1.44 94.17,114.3 100.33,108.14 U3.8
NetU2_10: U2.10 U2.22 | length 17.8
  Top Layer w0.33: U2.22 159.07,110.03 158.3,110.8 158.3,117.153 158.347,117.2 157.48,118.067 157.48,120.402 158.998,121.92 U2.10
NetU2_14: U2.14
NetU2_35: U2.35
SCK: P1.3 U1.3 | length 32.3
  Top Layer w0.33: U1.3 112.122,118.25 112.497,118.624 112.497,123.851 114.325,125.679 117.323,125.679 118.034,124.968 118.034,123.266 P1.3
pads on no net: SIM1.5 U1.26 U2.1 U2.2 U2.3 U2.4 U2.7 U2.8 U2.18 U2.23 U2.27 U2.28 U2.64 U2.65 U2.66 U3.1 U3.2 U3.7 U3.9 U3.10 U3.11 U3.14 U3.15 U3.16 U3.19

## Polygon pours and split planes (outlines as drawn)
GND on Top Layer "Keep-Out Layer-No Net" (solid, remove dead copper, pour order 6): 52.1,154.9 52.14,154.94 172.72,154.94 172.72,77.47 52.07,77.47
GND on Bottom Layer "Keep-Out Layer-No Net" (solid, remove dead copper, pour order 8): 52.07,154.94 172.72,154.94 172.72,77.47 53.34,77.47 52.07,78.74 52.07,77.47

## Keep-outs
Keep-Out Layer:
  lines w0.3: 52.1,77.5 52.1,154.9 172.72,154.9 172.72,77.5 52.1,77.5

## Silkscreen, mask and mechanical layers (free items; w line width, h text height)
Top Overlay:
  text "VM 0.4" at 154.94,80.01 h1.52

## Text inside footprints (layer, text, board x,y; h text height)
P1: Top Overlay "2" at 117.348,117.348 h1.27 r90; Top Overlay "1" at 119.888,117.348 h1.27 r90; Top Overlay "5" at 119.888,125.984 h1.27 r90; Top Overlay "6" at 117.348,125.984 h1.27 r90